# Altium PCB Air_Unit_240316.PcbDoc
Units mm, origin at the board's own origin, x right, y up, seen from the top; angles counter-clockwise.
Board outline 34 x 55 mm, 2 copper layers (Top Layer, Bottom Layer); 24 components, 25 nets, 159 pads, 21 vias.
Unrouted connection lines stored in the file: 3.
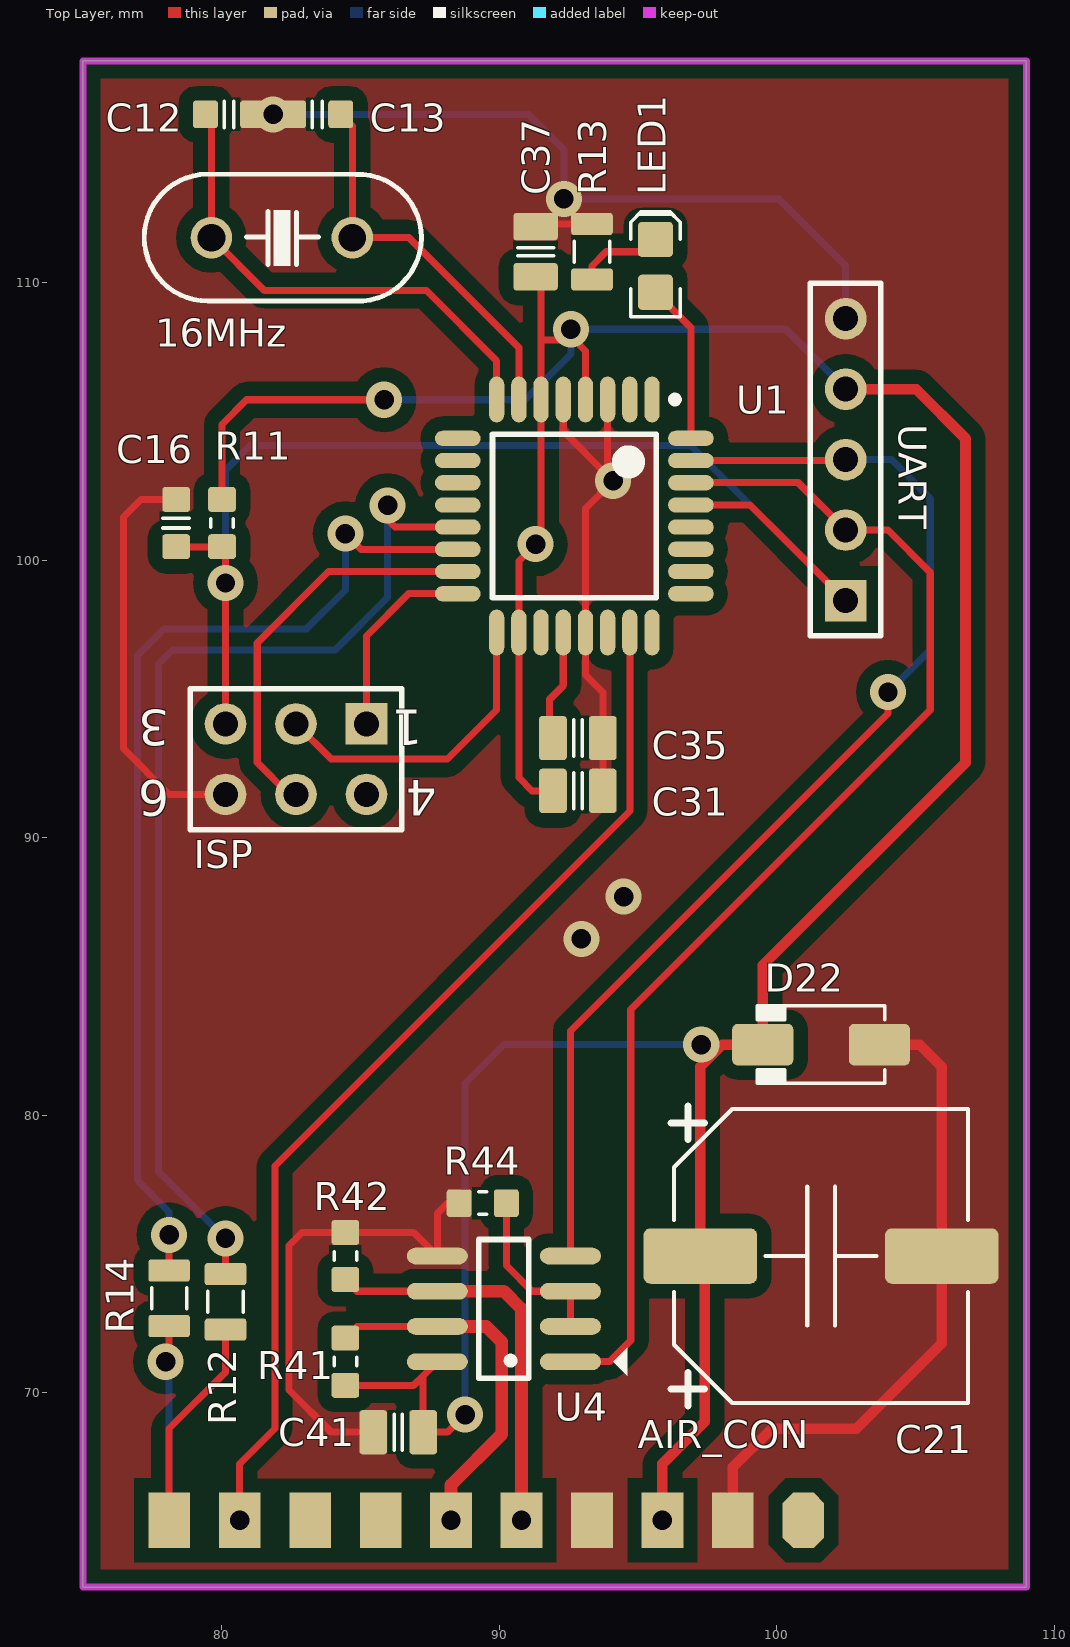
[diagram p0: Top Layer view]
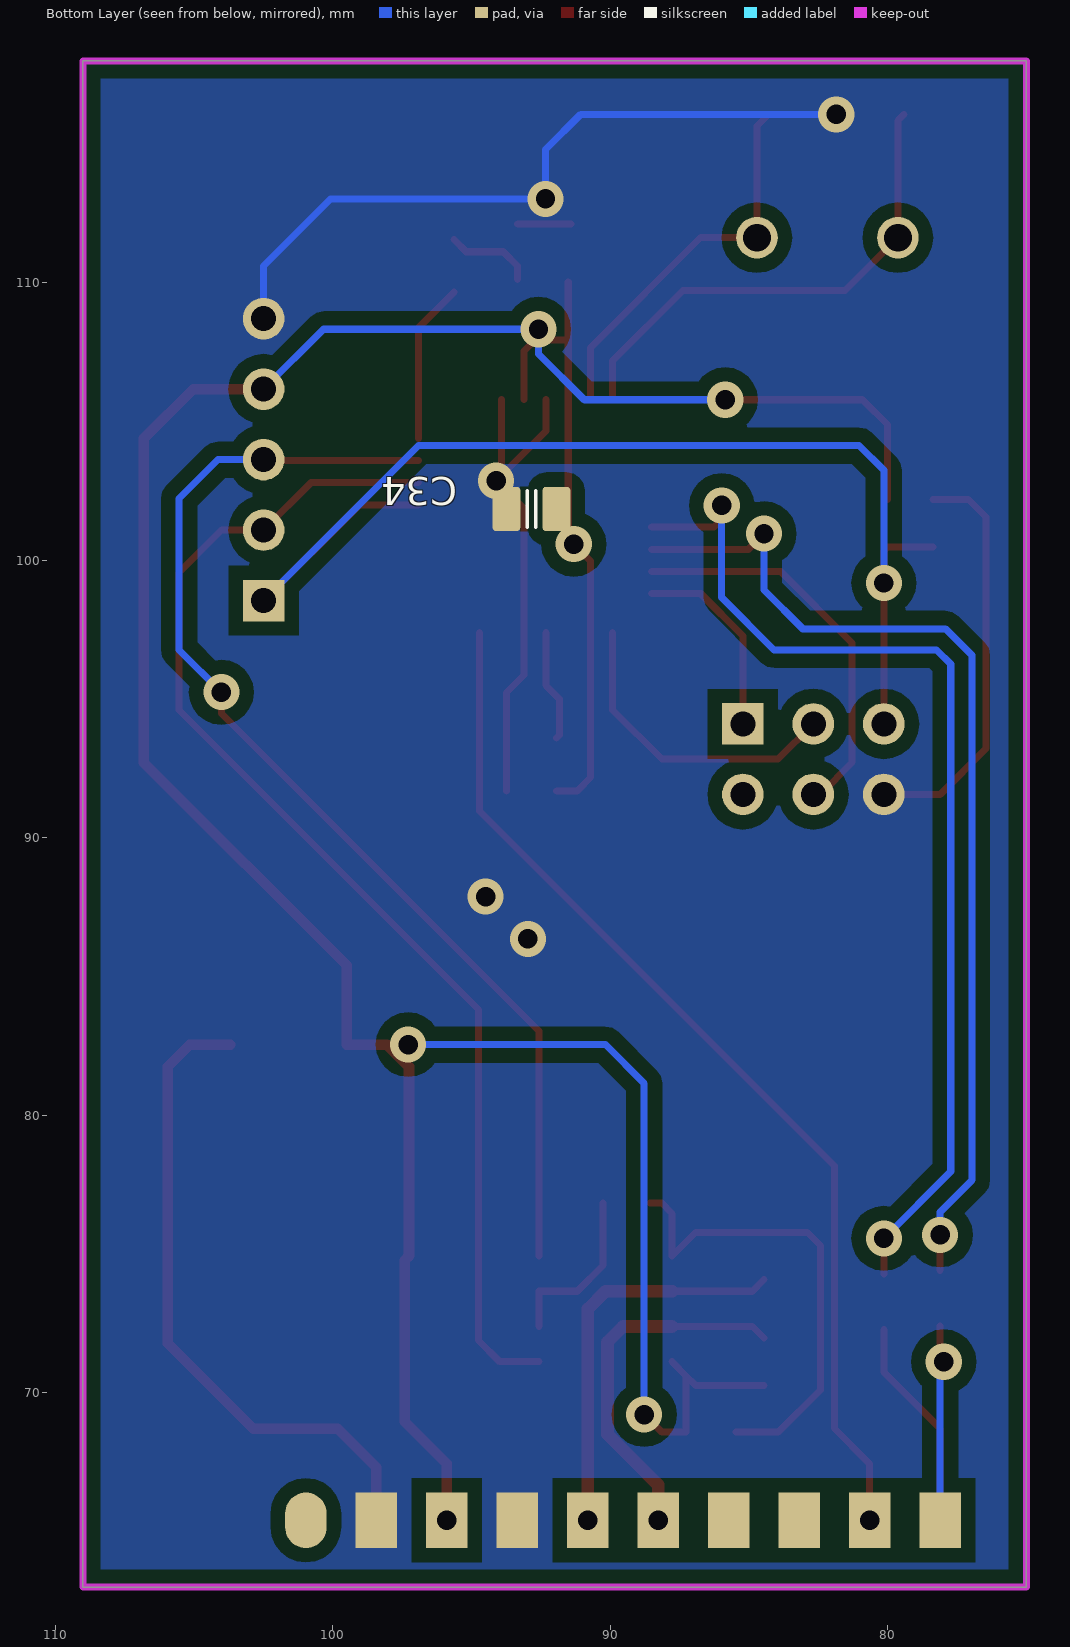
[diagram p1: Bottom Layer view, seen from below]
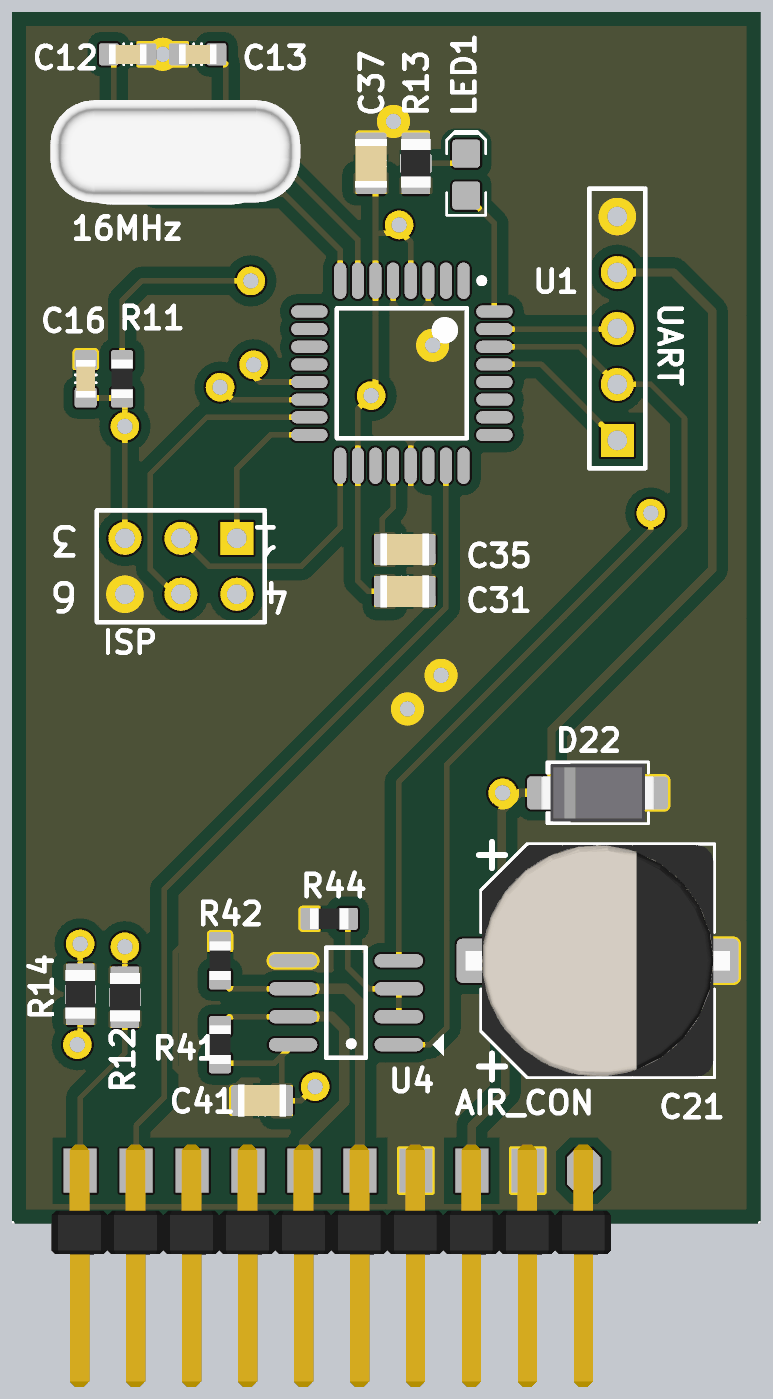
[diagram p2: 3D render of the assembled board from above, using the file's embedded part models]

## Layer stack, top to bottom
Top Solder: solder mask 0.0102, Solder Resist, Dk 3.5
Top Layer: signal copper 0.0356
Dielectric1: dielectric 0.32, FR-4, Dk 4.8
Bottom Layer: signal copper 0.0356
Bottom Solder: solder mask 0.0102, Solder Resist, Dk 3.5

## Board outline
75,63 75,118 109,118 109,63

## Design rules (kind name [scope] priority, off if disabled: settings)
Clearance [All] p1: gap=0.254 except(0.203: Arc-SMDPad Track-SMDPad SMDPad-SMDPad; 0.381: Arc-Via Track-Via SMDPad-Via THPad-Via Via-Via; 0.508: Arc-Poly Track-Poly SMDPad-Poly THPad-Poly Via-Poly Fill-Poly Poly-Poly)
HoleSize [All] p1: absolutevalues=TRUE maxlimit=5 minlimit=0.6 maxpercent=80.000 minpercent=20.000
HoleToHoleClearance [All] p1: gap=0 allowstackedmicrovias=TRUE
MinimumSolderMaskSliver [All] p1: minsoldermaskwidth=0
PlaneConnect [All] p1: planeconnectstyle=Direct reliefexpansion=0.508 reliefentries=4 reliefconductorwidth=0.254 reliefairgap=0.254
PolygonConnect [All] p1: connectstyle=Direct reliefconductorwidth=0.254 reliefentries=4 polygonreliefangle="90 Angle" airgapwidth=0.254
RoutingVias [All] p1: holewidth=0.711 width=1.27 viastyle="Through Hole" minholewidth=0.6 minwidth=1.1 maxholewidth=5 maxwidth=5
SilkToSilkClearance [All] p1: silktosilkclearance=0
SilkToSolderMaskClearance SilkscreenOverComponentPads [IsPad] p1: minsilkscreentomaskgap=0 clearancetoexposedcopper=TRUE
SolderMaskExpansion [All] p1: expansion=0.102
Width [All] p1: maxlimit=0.762 minlimit=0.254 preferedwidth=0.508
24 further rules are at their usual default settings.

## Components (designator, comment, footprint, x,y, rotation, side; value= is the part's Value field where it differs from the comment)
16MHz "16MHz" XT2 82.169,111.633 r180 top
AIR_CON "Header 10X2A" OMC10 100.965,65.405 r180 top
C12 "CAP NP" CAPC1608N 80.264,116.078 r0 top
C13 "CAP NP" CAPC1608N 83.439,116.078 r180 top
C16 "CAP NP" CAPC1608N 78.359,101.346 r270 top
C21 "2200uF/35V" CAP_ELEC_SIZE_G 101.6,74.93 r270 top
C31 "Cap" CAPC2012N_F#1 92.837,91.694 r0 top
C34 "Cap" CAPC2012N_F#2 92.837,101.854 r0 bottom
C35 "Cap" CAPC2012N_F#1 92.837,93.599 r0 top
C37 "Cap" CAPC2012N_F#1 91.313,111.125 r90 top
C41 "100nF/104" CAPC2012N_F#1 86.36,68.58 r0 top
D22 "Diode" DO-214AC 101.6,82.55 r180 top
ISP "Header 3X2A" HDR2X3_CEN 85.217,94.107 r180 top
LED1 "Blue" LED-0805-K 95.631,110.617 r90 top
R11 "Res" RESC1608N_ZERO 80.01,101.346 r90 top
R12 "Res" RESC2012N_F 80.137,73.279 r90 top
R13 "Res" RESC2012N_F 93.345,111.125 r270 top
R14 "Res" RESC2012N_F 78.105,73.406 r90 top
R41 "1k" RESC1608N_ZERO 84.455,71.12 r270 top
R42 "1k" RESC1608N_ZERO 84.455,74.93 r270 top
R44 "330R" RESC1608N_ZERO 89.408,76.835 r0 top
U1 "ATmega48/168/328" 32PIN 92.71,101.6 r270 top
U4 "MAX485" SO-8 90.17,73.025 r180 top
UART "Header 5" HDR1X5 102.489,98.552 r90 top

## Footprints (in the part's own frame and the unit in brackets; to place one, negate y for a bottom-side part, rotate by r counter-clockwise, add the part's x,y. Pads: shape width x height; smd on the part's side, far side on the other; paste and mask are expansions set on the pad)
32PIN [mm]
  oval 1.65x0.55 smd: 1(-4.2,2.8) 2(-4.2,2) 3(-4.2,1.2) 4(-4.2,0.4) 5(-4.2,-0.4) 6(-4.2,-1.2) 7(-4.2,-2) 8(-4.2,-2.8) 17(4.2,-2.8) 18(4.2,-2) 19(4.2,-1.2) 20(4.2,-0.4) 21(4.2,0.4) 22(4.2,1.2) 23(4.2,2) 24(4.2,2.8)
  oval 0.55x1.65 smd: 9(-2.8,-4.2) 10(-2,-4.2) 11(-1.2,-4.2) 12(-0.4,-4.2) 13(0.4,-4.2) 14(1.2,-4.2) 15(2,-4.2) 16(2.8,-4.2) 25(2.8,4.2) 26(2,4.2) 27(1.2,4.2) 28(0.4,4.2) 29(-0.4,4.2) 30(-1.2,4.2) 31(-2,4.2) 32(-2.8,4.2)
  silkscreen extent -4.32,-2.95 2.95,3.75, body extent -3.5,-3.5 3.5,3.5, height 1.2
CAP_ELEC_SIZE_G [mm] "Capacitor, polarized, aluminum can; 10.0x10.2mm DxH"
  round 0.635 on Mech14: 0(0,0)
  rrect25% 2x4.1 smd: 1(0,-4.35) 2(0,4.35)
  silkscreen extent -5.4,-5.4 5.4,5.3, body extent -5.25,-6 5.25,6, height 10.5
CAPC1608N [mm] "Chip Capacitor, Body 1.6x0.8mm, 0603, IPC Medium Density"
  round 0.254 on Mech14: 0(0,0)
  rrect25% 0.9x1 smd: 1(-0.85,0) 2(0.85,0)
  Top Layer pour cut-out: -0.4,0.6 0.4,0.6 0.4,-0.6 -0.4,-0.6
  silkscreen extent -0.18,-0.48 0.18,0.48, body extent -0.85,-0.45 0.85,0.45, height 0.89
CAPC2012N_F#1 [mm] "Chip Capacitor, Body 2.0x1.2mm, 0805, IPC Medium Density, for Flex circuits"
  round 0.254 on Mech14: 0(0,0)
  rrect25% 1.2x1.4 on Top Solder: 1(-0.9,0) 1(0.9,0)
  rrect25% 1x1.6 smd paste-1: 1(-0.9,0) 2(0.9,0)
  rrect25% 1x1.4 on Top Paste: 1(-0.9,0) 1(0.9,0)
  Top Layer pour cut-out: -0.4,0.8 0.4,0.8 0.4,-0.8 -0.4,-0.8
  silkscreen extent -0.15,-0.65 0.15,0.65, body extent -1.1,-0.72 1.1,0.73, height 1.34
CAPC2012N_F#2 [mm] "Chip Capacitor, Body 2.0x1.2mm, 0805, IPC Medium Density, for Flex circuits"
  round 0.254 on Mech14: 0(0,0)
  rrect25% 1.2x1.4 on Bottom Solder: 1(-0.9,0) 1(0.9,0)
  rrect25% 1x1.6 smd paste-1: 1(-0.9,0) 2(0.9,0)
  rrect25% 1x1.4 on Bottom Paste: 1(-0.9,0) 1(0.9,0)
  Top Layer pour cut-out: -0.4,0.8 0.4,0.8 0.4,-0.8 -0.4,-0.8
  silkscreen extent -0.15,-0.65 0.15,0.65, body extent -1.1,-0.72 1.1,0.73, height 1.34
DO-214AC [mm] "JEDEC DO214 variation AC. SMA"
  round 0.508 on Mech14: 0(0,0)
  rrect25% 2.2x1.5 smd: A(-2.1,0) K(2.1,0)
  silkscreen extent -2.3,-1.4 2.3,1.4, body extent -2.6,-1.3 2.6,1.3, height 2.42
HDR1X5 [mm] "Connector; Header; 5 Position"
  rect 1.5x1.5 hole 0.9: 1(0,0)
  round 1.5 hole 0.9: 2(2.54,0) 3(5.08,0) 4(7.62,0) 5(10.16,0)
  silkscreen extent -1.27,-1.27 11.43,1.27
HDR2X3_CEN [mm] "Connector; Header; 3x2 Position"
  rect 1.5x1.5 hole 0.9: 1(0,0)
  round 1.5 hole 0.9: 2(2.54,0) 3(5.08,0) 4(0,2.54) 5(2.54,2.54) 6(5.08,2.54)
  silkscreen extent -1.27,-1.27 6.35,3.81
LED-0805-K [mil]
  round 20 on Mech14: 0(0,0)
  rrect25% 50x50 smd: A(-37.5,0) K(37.5,0)
  Top Layer pour cut-out: -15,30 15,30 15,-30 -15,-30
  silkscreen extent -72,-35 77,35, body extent -39,-25 39,25, height 31
OMC10 [mm]
  oct 1.5x2 smd: 1(0,0)
  rect 1.5x2 smd: 2(2.54,0) 3(5.08,0) 4(7.62,0) 5(10.16,0) 6(12.7,0) 7(15.24,0) 8(17.78,0) 9(20.32,0) 10(22.86,0)
  oval 1.5x2 smd far side: 11(0,0)
  rect 1.5x2 smd far side: 12(2.54,0) 13(5.08,0) 14(7.62,0) 15(10.16,0) 16(12.7,0) 17(15.24,0) 18(17.78,0) 19(20.32,0) 20(22.86,0)
  body extent -1.24,-1.18 24.16,9.82, height 2.33
RESC1608N_ZERO [mm] "Chip Resistor, Body 1.6x0.8mm, 0603, IPC Medium Density"
  round 0.254 on Mech14: 0(0,0)
  rrect25% 0.9x1 smd: 1(-0.85,0) 2(0.85,0)
  Top Layer pour cut-out: -0.4,0.6 0.4,0.6 0.4,-0.6 -0.4,-0.6
  silkscreen extent -0.15,-0.41 0.15,0.41, body extent -0.87,-0.47 0.88,0.48, height 0.54
RESC2012N_F [mm] "Chip Resistor, Body 2.0x1.2mm, 0805, IPC Medium Density"
  round 0.254 on Mech14: 0(0,0)
  rrect25% 1x1.3 on Top Solder: 1(-1,0) 1(1,0)
  rrect25% 0.8x1.5 smd paste-1: 1(-1,0) 2(1,0)
  rrect25% 0.8x1.3 on Top Paste: 1(-1,0) 1(1,0)
  Top Layer pour cut-out: -0.6,0.75 0.6,0.75 0.6,-0.75 -0.6,-0.75
  silkscreen extent -0.38,-0.64 0.38,0.64, body extent -1.1,-0.67 1.1,0.68, height 0.69
SO-8 [mm] "8-Pin Small Outline Integrated Circuit 1.27 mm Pitch, IPC Medium Density"
  oval 2.2x0.6 smd: 1(-2.4,1.905) 2(-2.4,0.635) 3(-2.4,-0.635) 4(-2.4,-1.905) 5(2.4,-1.905) 6(2.4,-0.635) 7(2.4,0.635) 8(2.4,1.905)
  silkscreen extent -4.44,-2.5 0.9,2.5, body extent -1.95,-2.45 1.95,2.45, height 1.75
XT2 [mm]
  round 1.5 hole 1: 1(-2.54,0) 2(2.54,0)
  silkscreen extent -5.03,-2.29 4.96,2.29, body extent -5.93,-2.36 5.42,2.29, height 3.5

## Part data
16MHz: library part Crystal
AIR_CON: "Header, 10-Pin, Dual row"
C21: library part CP4, "Cap 1000uF/16V - 220uF/50V"
C41: library part "CAP NP"
ISP: "Header, 3-Pin, Dual row"
LED1: library part LED_SMD_Blue_0805_100mcd, "LED 0805 SMD Blue 100mcd 470nm"
R41 R42 R44: library part Res, "Tro dan"
U4: "RS232 - RS485 (Same sn75176)"
UART: "Header, 5-Pin"

## Via types
v1: diameter 1.3, hole 0.7, Top Layer to Bottom Layer, 21 vias

## Nets (pads, with @x,y where several pads share a name; then routed paths per layer and width w, separated by ;. In a path a pad name is that pad's centre, name@x,y a point inside that pad or via, vN(x,y) a via of type N, cw(c..) or ccw(c..) an arc to the next point about the centre after c; other vN are vias at no path point)
+3V3: AIR_CON.7 AIR_CON.17
+5V_IN: AIR_CON.3 AIR_CON.13 C21.1 C31.1@91.937,91.694 C34.1@91.937,101.854 C37.1@91.313,110.225 C41.2 D22.K ISP.4 R11.2 R41.2 U1.4 U1.6 U1.18 U4.8 UART.4 | length 129.1
  Top Layer w0.254: R11.2 80.01,104.902 80.899,105.791 v1(85.852,105.791) ; R41.2 86.92,70.27 87.26,70.61 ; U4.8 87.26,70.61 ; v1(88.773,69.215) 88.138,68.58 C41.2 87.26,70.61 ; C37.1@91.51,110.028 91.51,107.95 ; C31.1@91.937,91.694 91.186,91.694 90.71,92.17 U1.18 90.71,99.981 v1(91.313,100.584) 91.51,100.781 U1.6 91.51,107.95 ; v1@92.583,107.95 91.51,107.95 ; v1@92.71,107.95 93.11,107.55 U1.4
  Top Layer w0.381: v1(95.885,65.405) 95.885,67.437 97.409,68.961 97.409,74.771 C21.1 97.25,81.756 98.044,82.55 D22.K 99.5,85.403 106.807,92.71 106.807,104.394 105.029,106.172 UART.4
  Bottom Layer w0.254: v1(85.852,105.791) 90.932,105.791 92.583,107.442 v1(92.583,108.331) 100.33,108.331 UART.4 ; v1(88.773,69.215) 88.773,81.153 90.17,82.55 v1(97.282,82.55)
+12V_IN: AIR_CON.1 AIR_CON.11
AREF: C35.1@91.937,93.599 U1.20 | length 4.1
  Top Layer w0.254: C35.1@91.937,93.599 91.821,93.715 91.821,94.996 92.31,95.485 U1.20
GND: AIR_CON.2 AIR_CON.4 AIR_CON.12 AIR_CON.14 C12.2 C13.2 C16.1 C21.2 C31.2 C34.2 C35.2 C37.2 C41.1@85.46,68.58 D22.A ISP.6 R13.1@93.345,112.125 R42.1 R44.1 U1.3 U1.5 U1.21 U4.5 UART.5 | length 102
  Top Layer w0.254: C16.1 77.089,102.196 76.454,101.561 76.454,93.218 78.105,91.567 ISP.6 ; C41.1@85.46,68.58 83.947,68.58 82.423,70.104 82.423,75.311 82.892,75.78 R42.1 86.92,75.78 U4.5 87.77,76.467 88.138,76.835 R44.1 ; C37.2@91.413,112.125 R13.1@93.345,112.125 ; U1.5 92.31,104.667 v1@93.91,103.067 ; C31.2 C35.2 93.737,95.239 93.11,95.866 U1.21 93.11,101.873 v1(94.107,102.87) v1@93.91,103.067 ; U1.3 v1@93.91,103.067
  Top Layer w0.381: AIR_CON.2 98.425,67.31 99.822,68.707 102.87,68.707 105.95,71.787 C21.2 105.95,81.756 105.156,82.55 D22.A
  Bottom Layer w0.254: v1(81.852,116.078) 91.059,116.078 92.329,114.808 v1(92.329,113.03) 100.076,113.03 102.489,110.617 UART.5
  other v1: 92.964,86.36 94.488,87.884
IDC: AIR_CON.9 AIR_CON.19 U1.23 | length 37.8
  Top Layer w0.254: v1(80.645,65.405) 80.645,67.437 81.915,68.707 81.915,78.178 94.71,90.973 U1.23
IRA+: AIR_CON.10 R12.1@80.137,72.279 | length 7.7
  Top Layer w0.254: AIR_CON.10 78.105,68.707 80.137,70.739 R12.1@80.137,72.279
IRB+: AIR_CON.20 R14.1@78.105,72.406 | length 7.1
  Top Layer w0.254: v1(77.978,71.12) 78.105,71.247 R14.1@78.105,72.406
  Bottom Layer w0.254: v1(77.978,71.12) 78.105,70.993 AIR_CON.20
LED: LED1.A U1.32 | length 5.8
  Top Layer w0.254: LED1.A 96.91,108.385 U1.32
MCU_RX: U1.30 U4.1 UART.2 | length 44.6
  Top Layer w0.254: U4.1 93.98,71.12 94.742,71.882 94.742,83.82 105.537,94.615 105.537,99.568 104.013,101.092 UART.2 100.781,102.8 U1.30
MCU_TX: U1.31 U4.4 UART.3 | length 41.8
  Top Layer w0.254: U4.4 92.57,83.045 104.013,94.488 v1(104.013,95.25) ; U1.31 UART.3@102.457,103.6
  Bottom Layer w0.254: UART.3 104.14,103.632 105.537,102.235 105.537,96.774 v1(104.013,95.25)
MISO: ISP.1 U1.16 | length 7.1
  Top Layer w0.254: ISP.1 85.217,97.282 86.735,98.8 U1.16
MOSI: ISP.5 U1.15 | length 14.5
  Top Layer w0.254: ISP.5 82.423,91.567 81.28,92.71 81.28,97.028 83.852,99.6 U1.15
NetLED1_K: LED1.K R13.2 | length 3.2
  Top Layer w0.254: R13.2 93.345,110.617 93.853,111.125 95.186,111.125 LED1.K
NetR12_2: R12.2 U1.13 | length 39.1
  Top Layer w0.254: R12.2 v1(80.137,75.565) ; v1(85.979,101.981) 85.979,101.473 86.252,101.2 U1.13
  Bottom Layer w0.254: v1(80.137,75.565) 77.724,77.978 77.724,96.266 78.232,96.774 84.092,96.774 85.979,98.661 v1(85.979,101.981) v1@85.725,101.727
NetR14_2: R14.2 U1.14 | length 37.4
  Top Layer w0.254: R14.2 v1(78.105,75.692) ; v1(84.455,100.965) 85.02,100.4 U1.14
  Bottom Layer w0.254: v1(78.105,75.692) 78.105,76.519 76.962,77.662 76.962,96.582 77.916,97.536 83.058,97.536 84.455,98.933 v1(84.455,100.965)
PPM1: U1.9
PPM2: U1.10
RS485A: AIR_CON.5 AIR_CON.15 R42.2 U4.6 | length 14.4
  Top Layer w0.254: R42.2 84.875,73.66 U4.6
  Top Layer w0.457: U4.6 90.17,73.66 90.805,73.025 v1(90.805,65.405)
RS485B: AIR_CON.6 AIR_CON.16 R41.1 U4.7 | length 13.2
  Top Layer w0.254: R41.1 84.875,72.39 U4.7
  Top Layer w0.457: U4.7 89.535,72.39 90.094,71.831 90.094,68.504 88.265,66.675 v1(88.265,65.405)
RS485D: R44.2 U4.2 U4.3 | length 6.2
  Top Layer w0.254: R44.2 90.258,74.588 91.186,73.66 U4.3 U4.2
RST: C16.2 ISP.3 R11.1 U1.29 UART.1 | length 44.2
  Top Layer w0.254: C16.2@78.359,100.477 80.01,100.477 80.137,100.35 v1(80.137,99.187) ISP.3 ; U1.29 99.041,102 UART.1
  Bottom Layer w0.254: v1(80.137,99.187) 80.137,103.251 81.026,104.14 96.901,104.14 UART.1
SCK: ISP.2 U1.17 | length 11.3
  Top Layer w0.254: ISP.2 83.947,92.837 88.138,92.837 89.91,94.609 U1.17
XTAL1: 16MHz.1 C13.1 U1.7 | length 14.1
  Top Layer w0.254: C13.1 84.709,115.658 16MHz.1 86.741,111.633 90.71,107.664 U1.7
XTAL2: 16MHz.2 C12.1 U1.8 | length 18
  Top Layer w0.254: C12.1 79.629,115.863 16MHz.2 81.534,109.728 87.376,109.728 89.91,107.194 U1.8
pads on no net: AIR_CON.8 AIR_CON.18 C12.0 C13.0 C16.0 C21.0 C31.0 C31.1@91.937,91.694 C31.1@93.737,91.694 C34.0 C34.1@91.937,101.854 C34.1@93.737,101.854 C35.0 C35.1@91.937,93.599 C35.1@93.737,93.599 C37.0 C37.1@91.313,110.225 C37.1@91.313,112.025 C41.0 C41.1@85.46,68.58 C41.1@87.26,68.58 D22.0 LED1.0 R11.0 R12.0 R12.1@80.137,72.279 R12.1@80.137,74.279 R13.0 R13.1@93.345,110.125 R13.1@93.345,112.125 R14.0 R14.1@78.105,72.406 R14.1@78.105,74.406 R41.0 R42.0 R44.0 U1.1 U1.2 U1.11 U1.12 U1.19 U1.22 U1.24 U1.25 U1.26 U1.27 U1.28

## Polygon pours and split planes (outlines as drawn)
GND on Top Layer "Top Layer-No Net" (solid, remove dead copper, pour order 0): 109,63 75,63 75,118 109,118
GND on Bottom Layer "Top Layer-No Net" (solid, remove dead copper, pour order 2): 75,63 109,63 109,118 75,118

## Keep-outs
Keep-Out Layer:
  the board outline again, w0.254

## Dimensions
70,63 to 71,118 on Top Overlay
75,63 to 109,64 on Top Overlay

## Text inside footprints (layer, text, board x,y; h text height)
ISP: Top Overlay "6" at 78.105,92.075 h1.27 r180; Top Overlay "3" at 78.105,94.615 h1.27 r180; Top Overlay "1" at 87.249,94.615 h1.27 r180; Top Overlay "4" at 87.757,92.075 h1.27 r180